# Altium PCB BaseStation.PcbDoc (part 1 of 2)
Units mil, origin at the board's own origin, x right, y up, seen from the top; angles counter-clockwise.
Board outline 2500 x 2500 mil, 4 copper layers (Component Side, Ground Plane, Power Plane, Solder Side), stack 60.8 mil thick; 157 components, 102 nets, 605 pads, 408 vias.
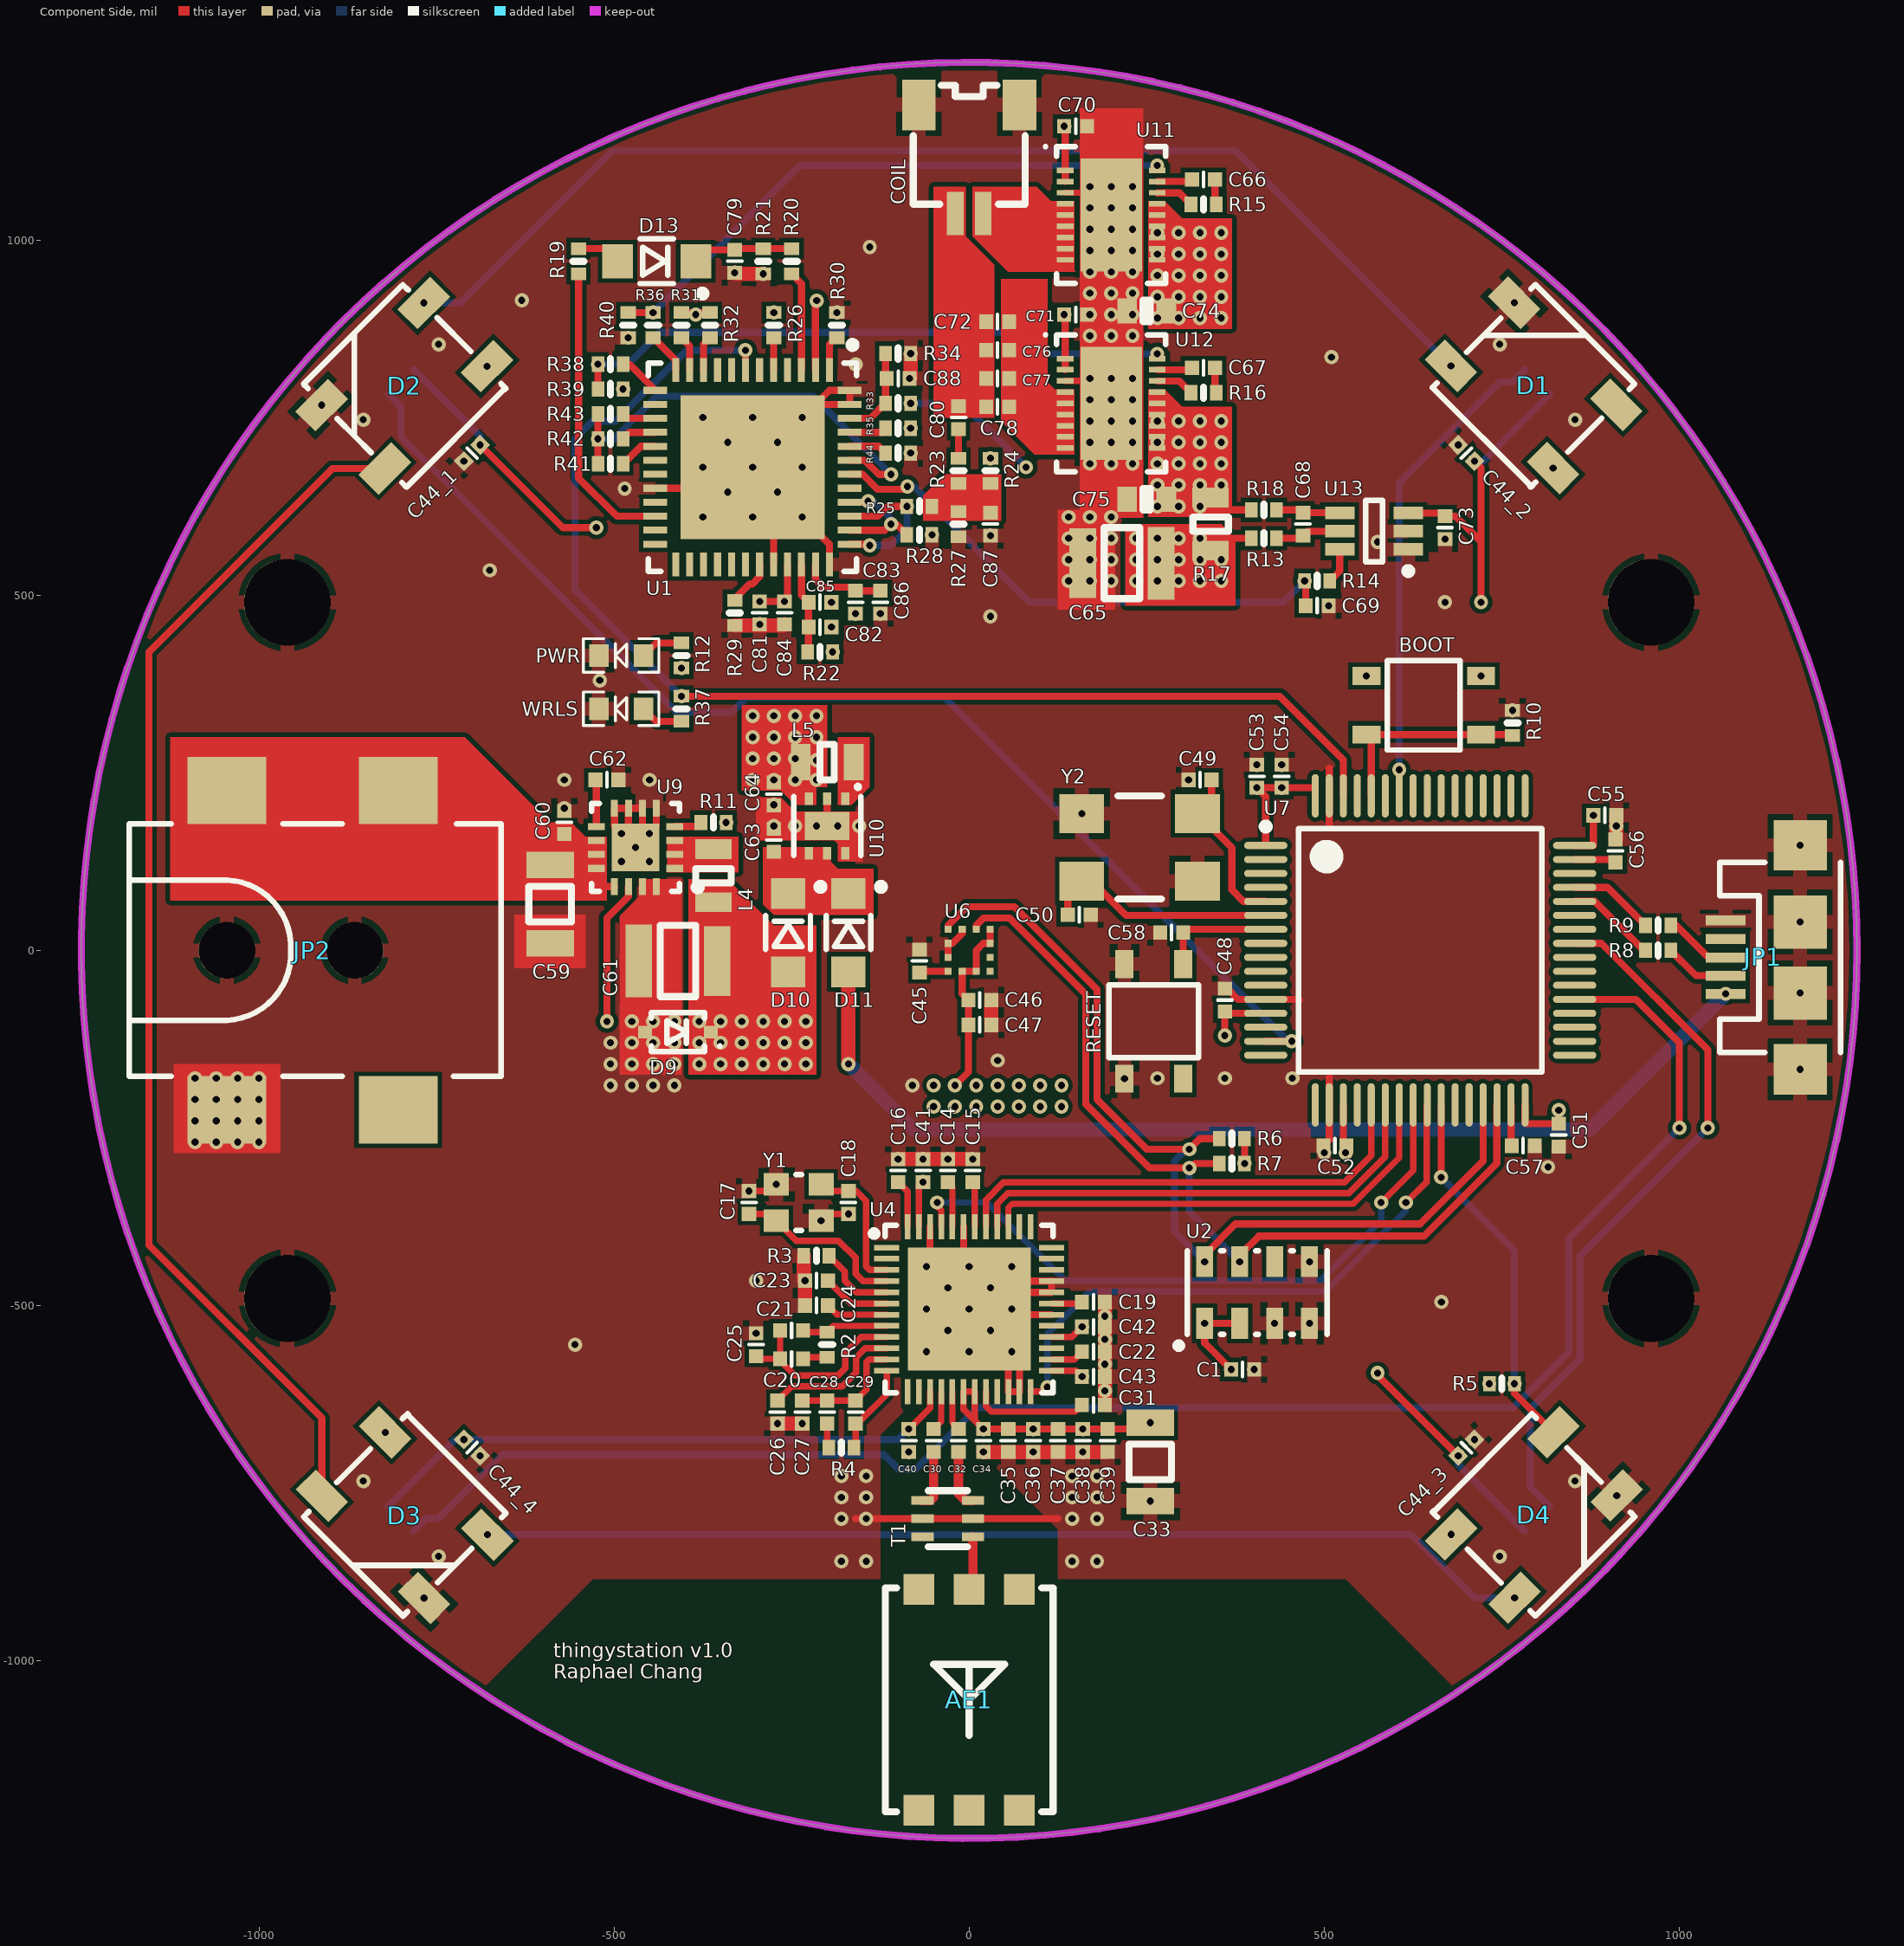
[diagram p0: Component Side view]
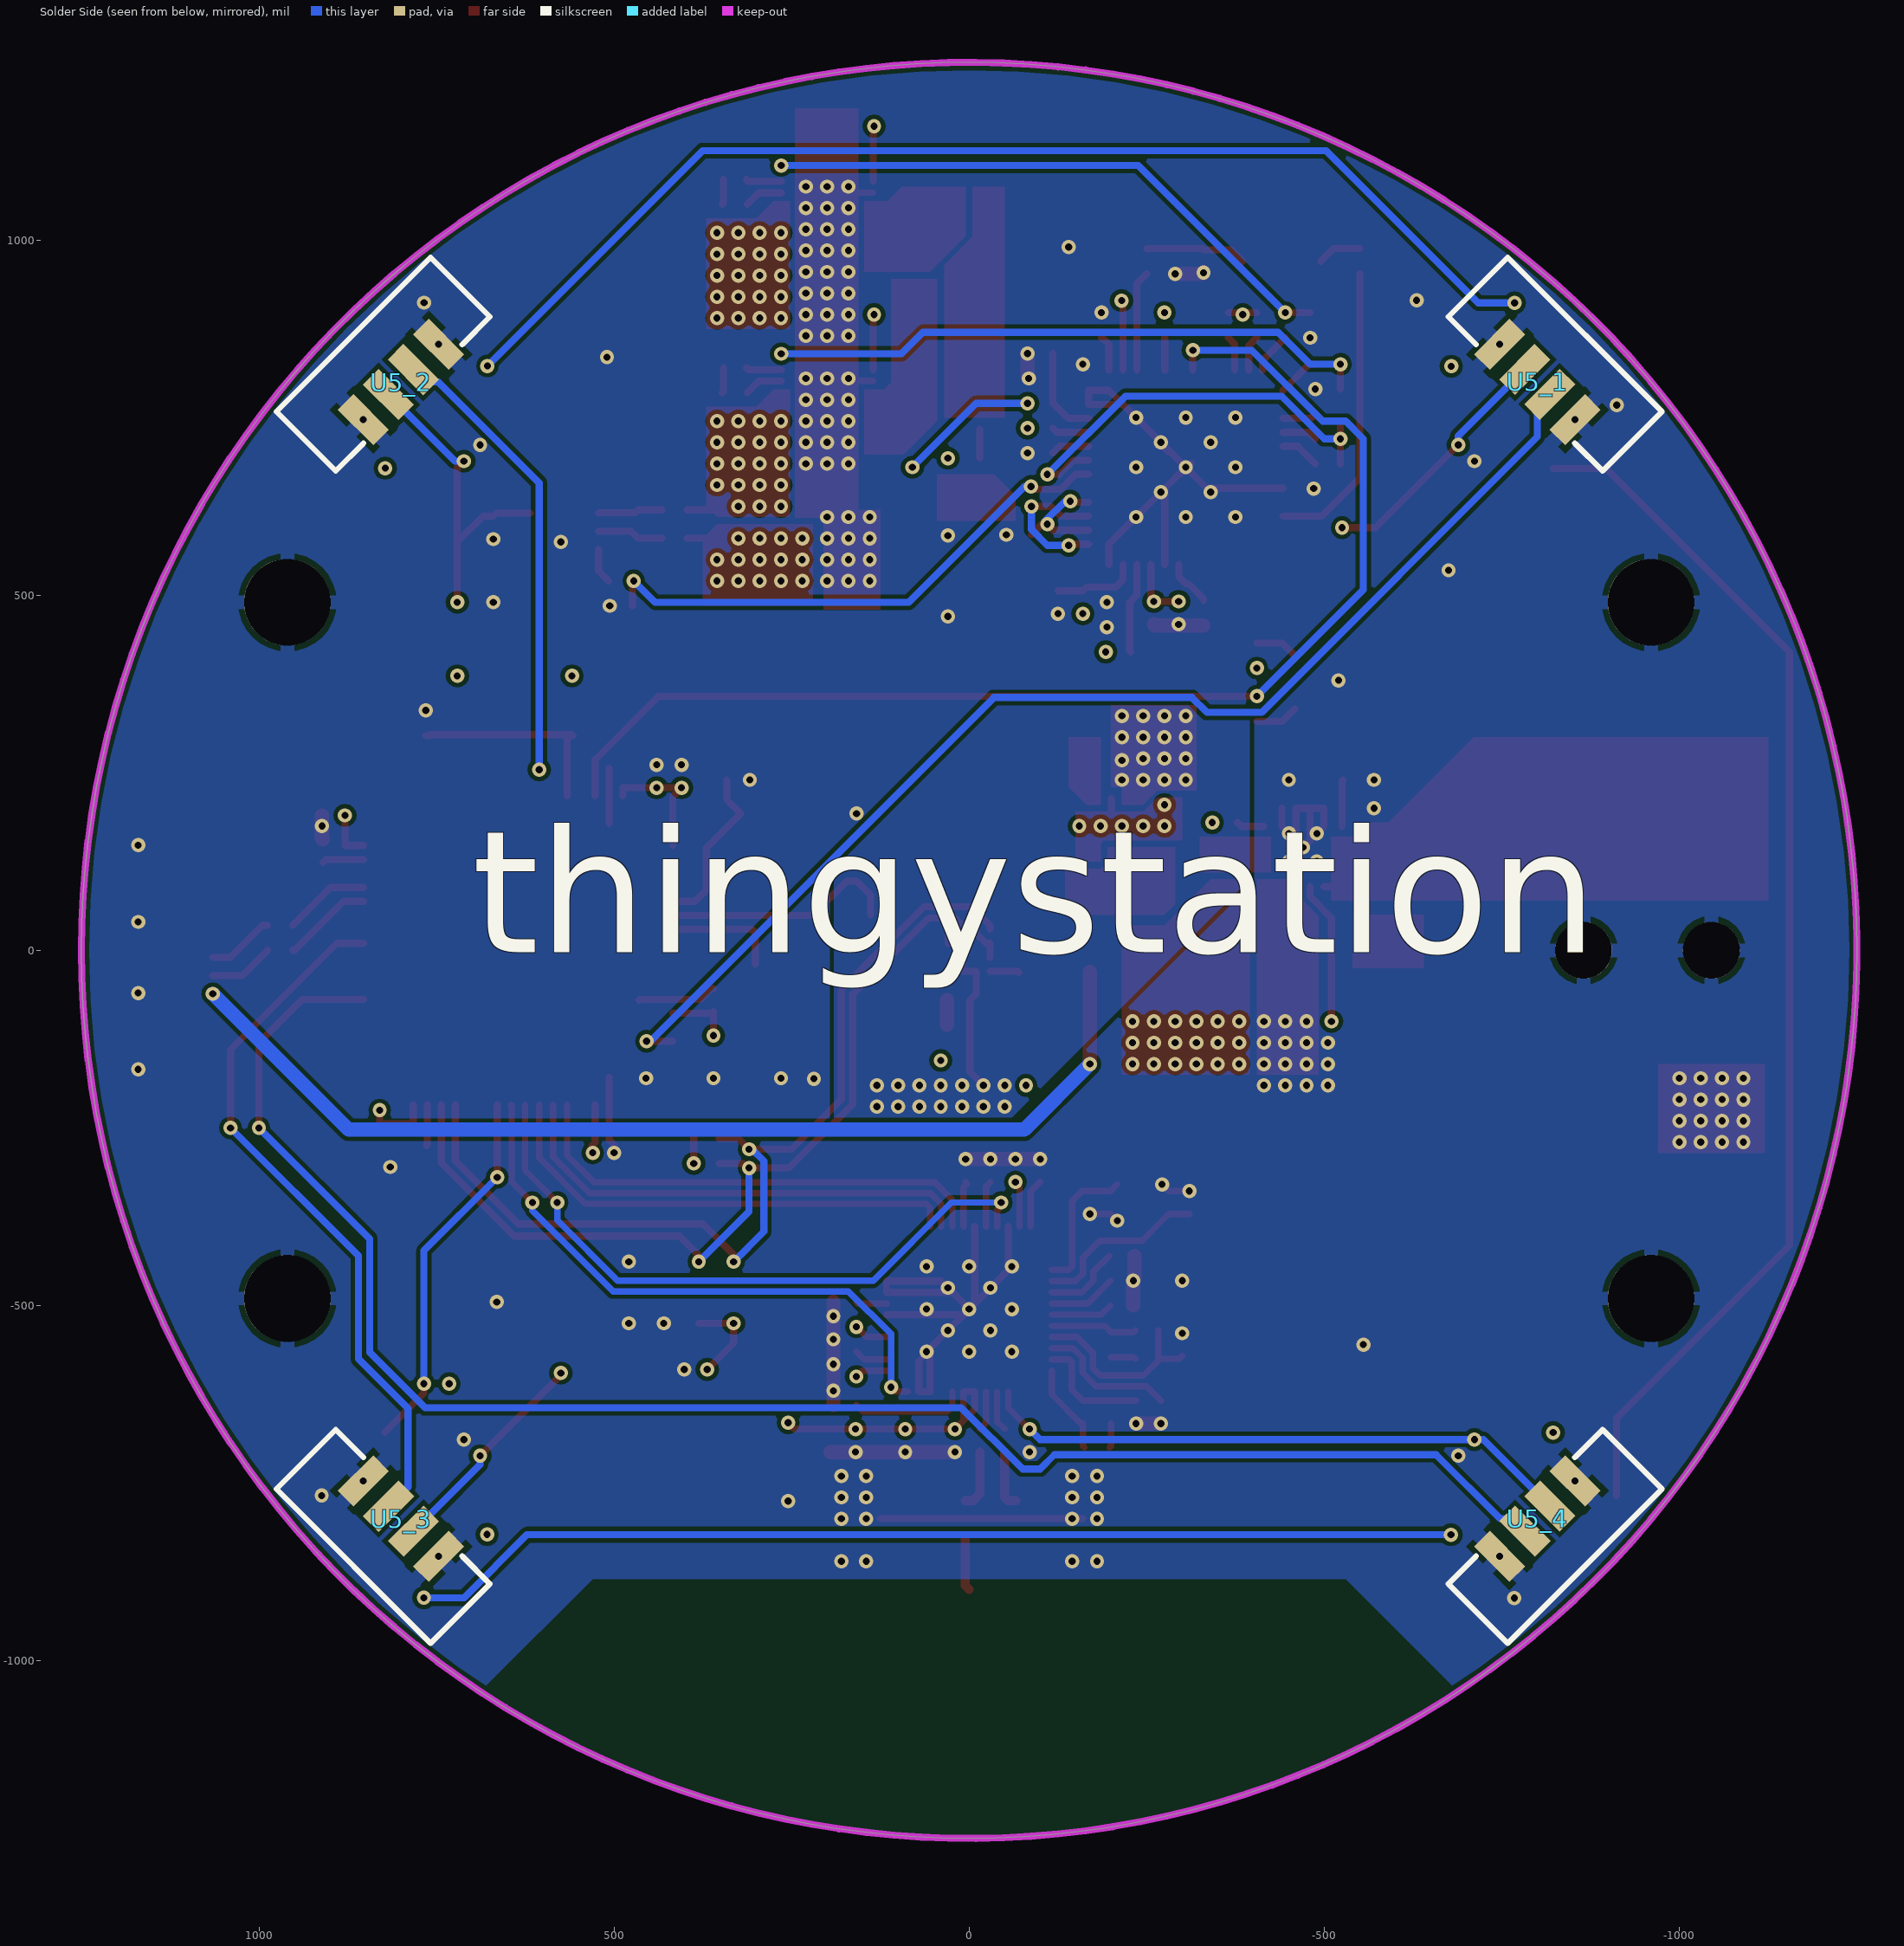
[diagram p1: Solder Side view, seen from below]
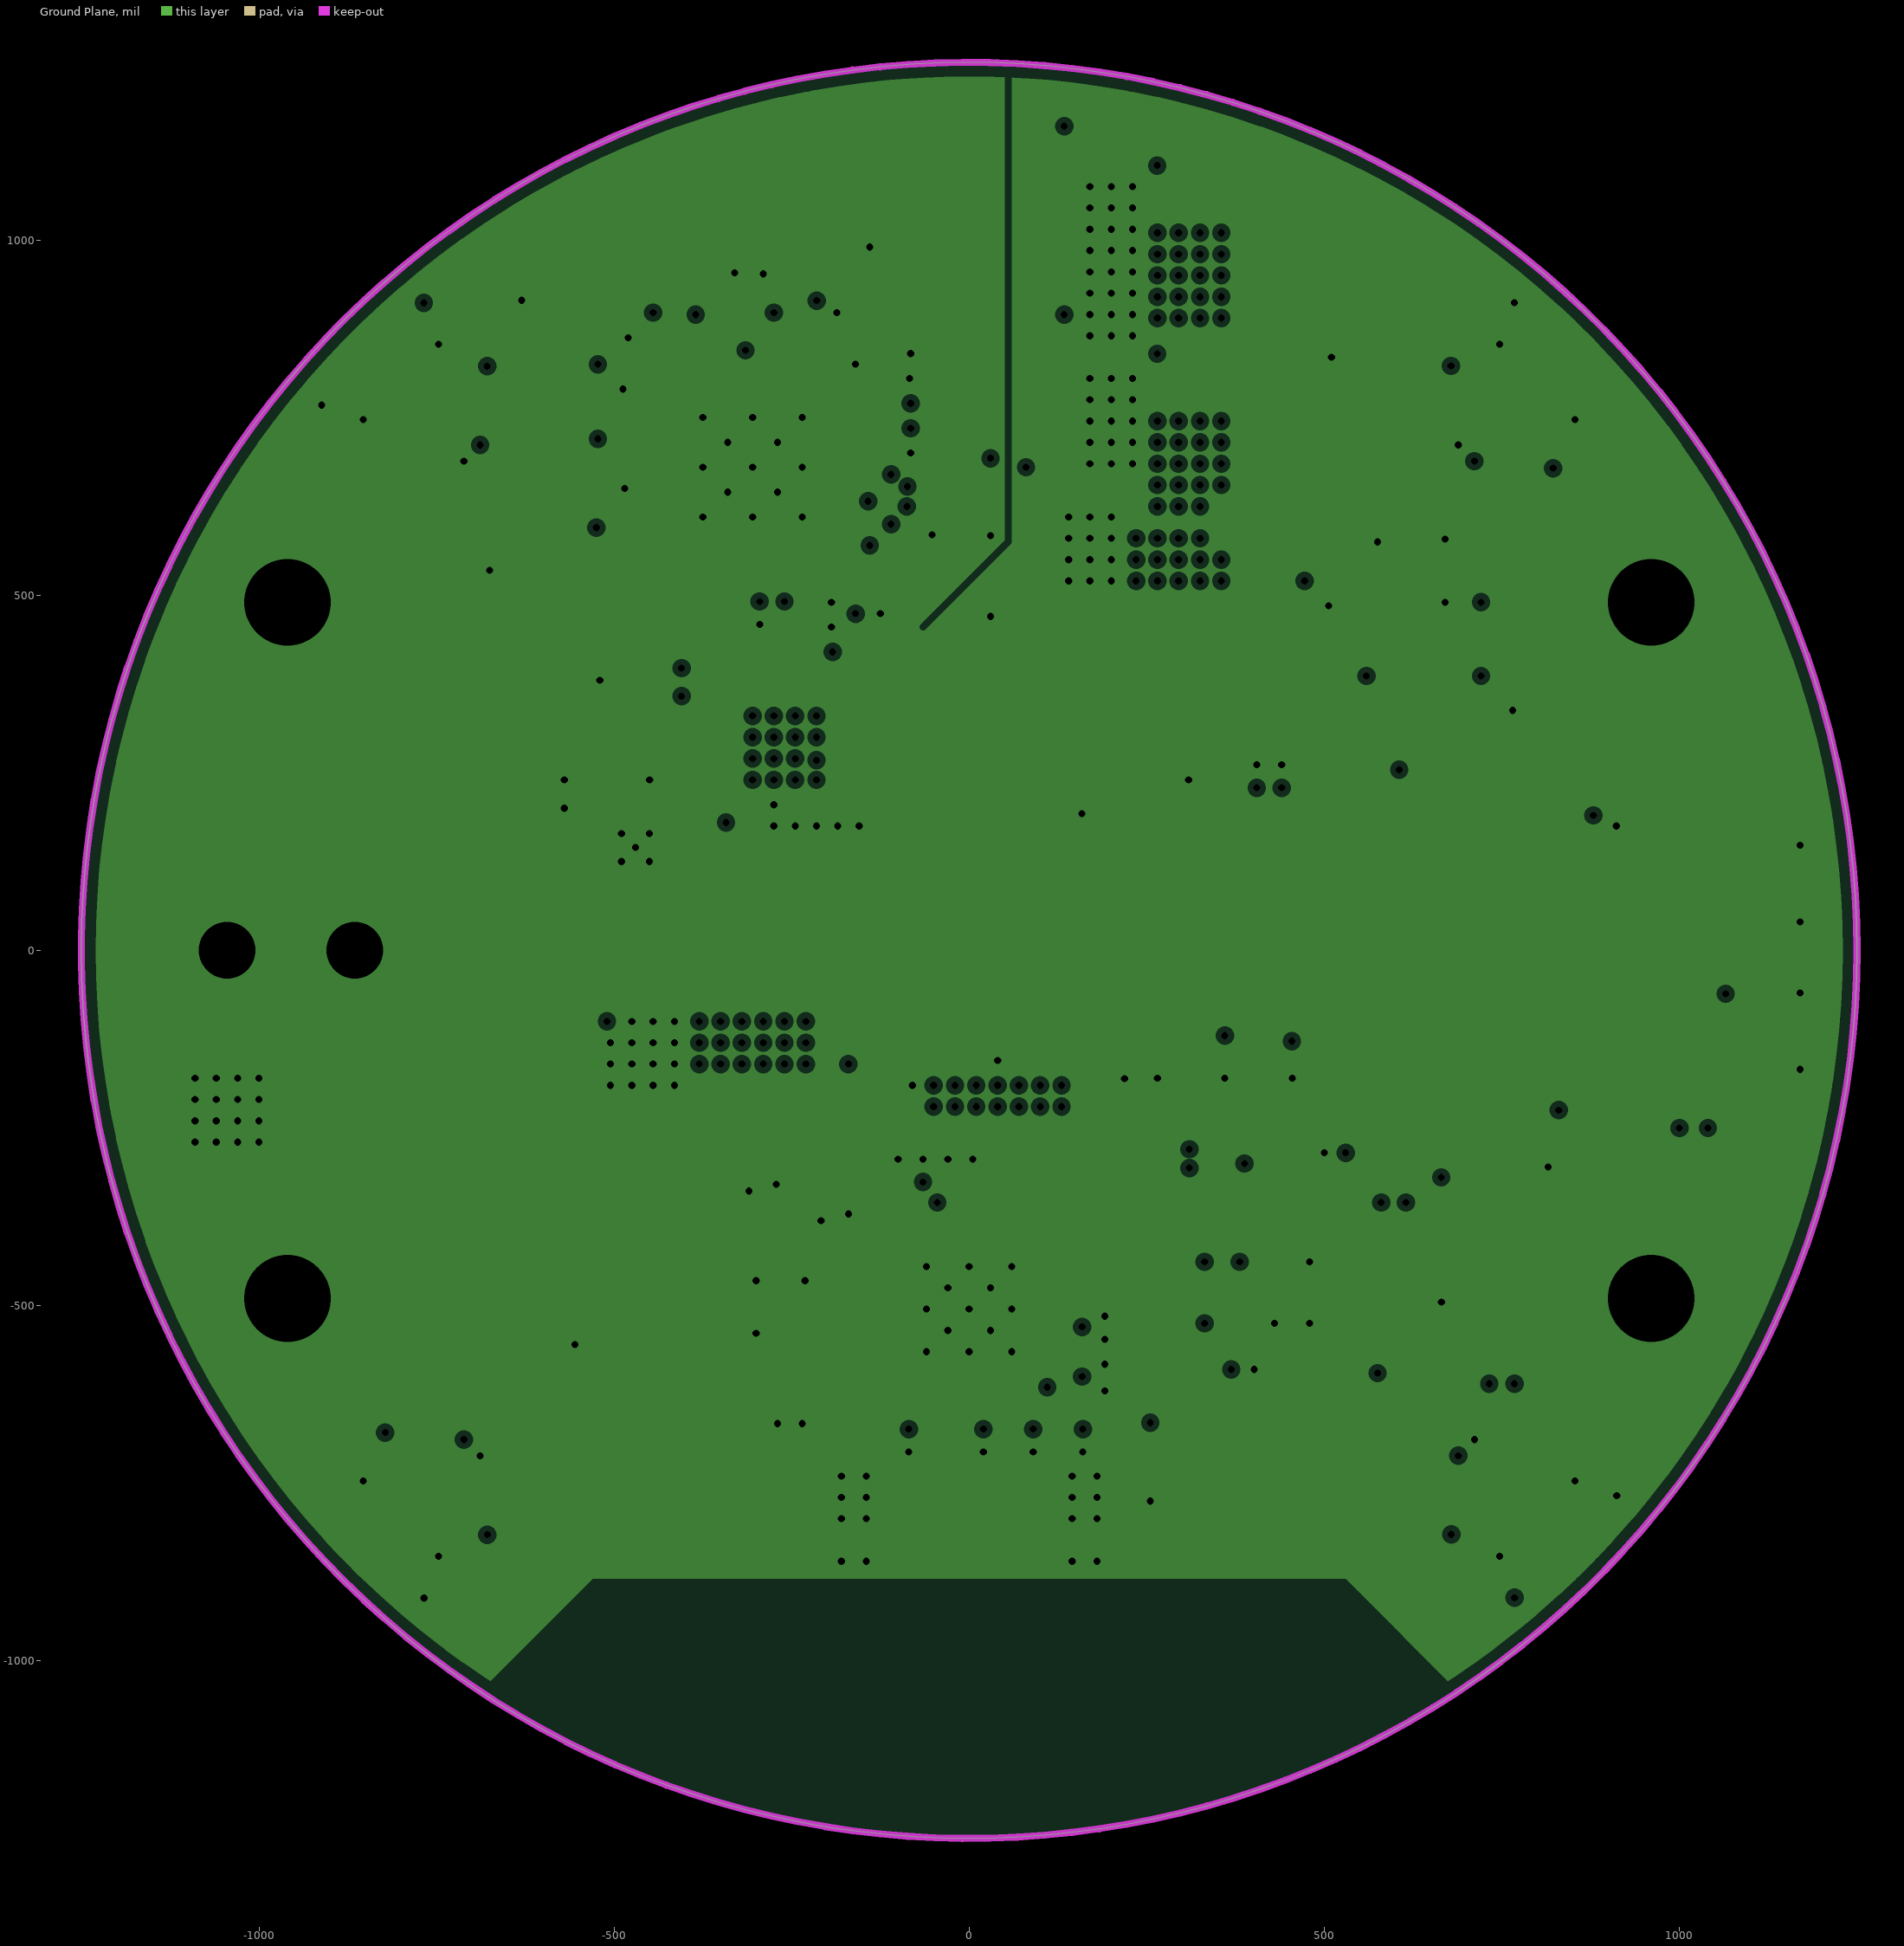
[diagram p2: Ground Plane, clearances drawn from the general rule]
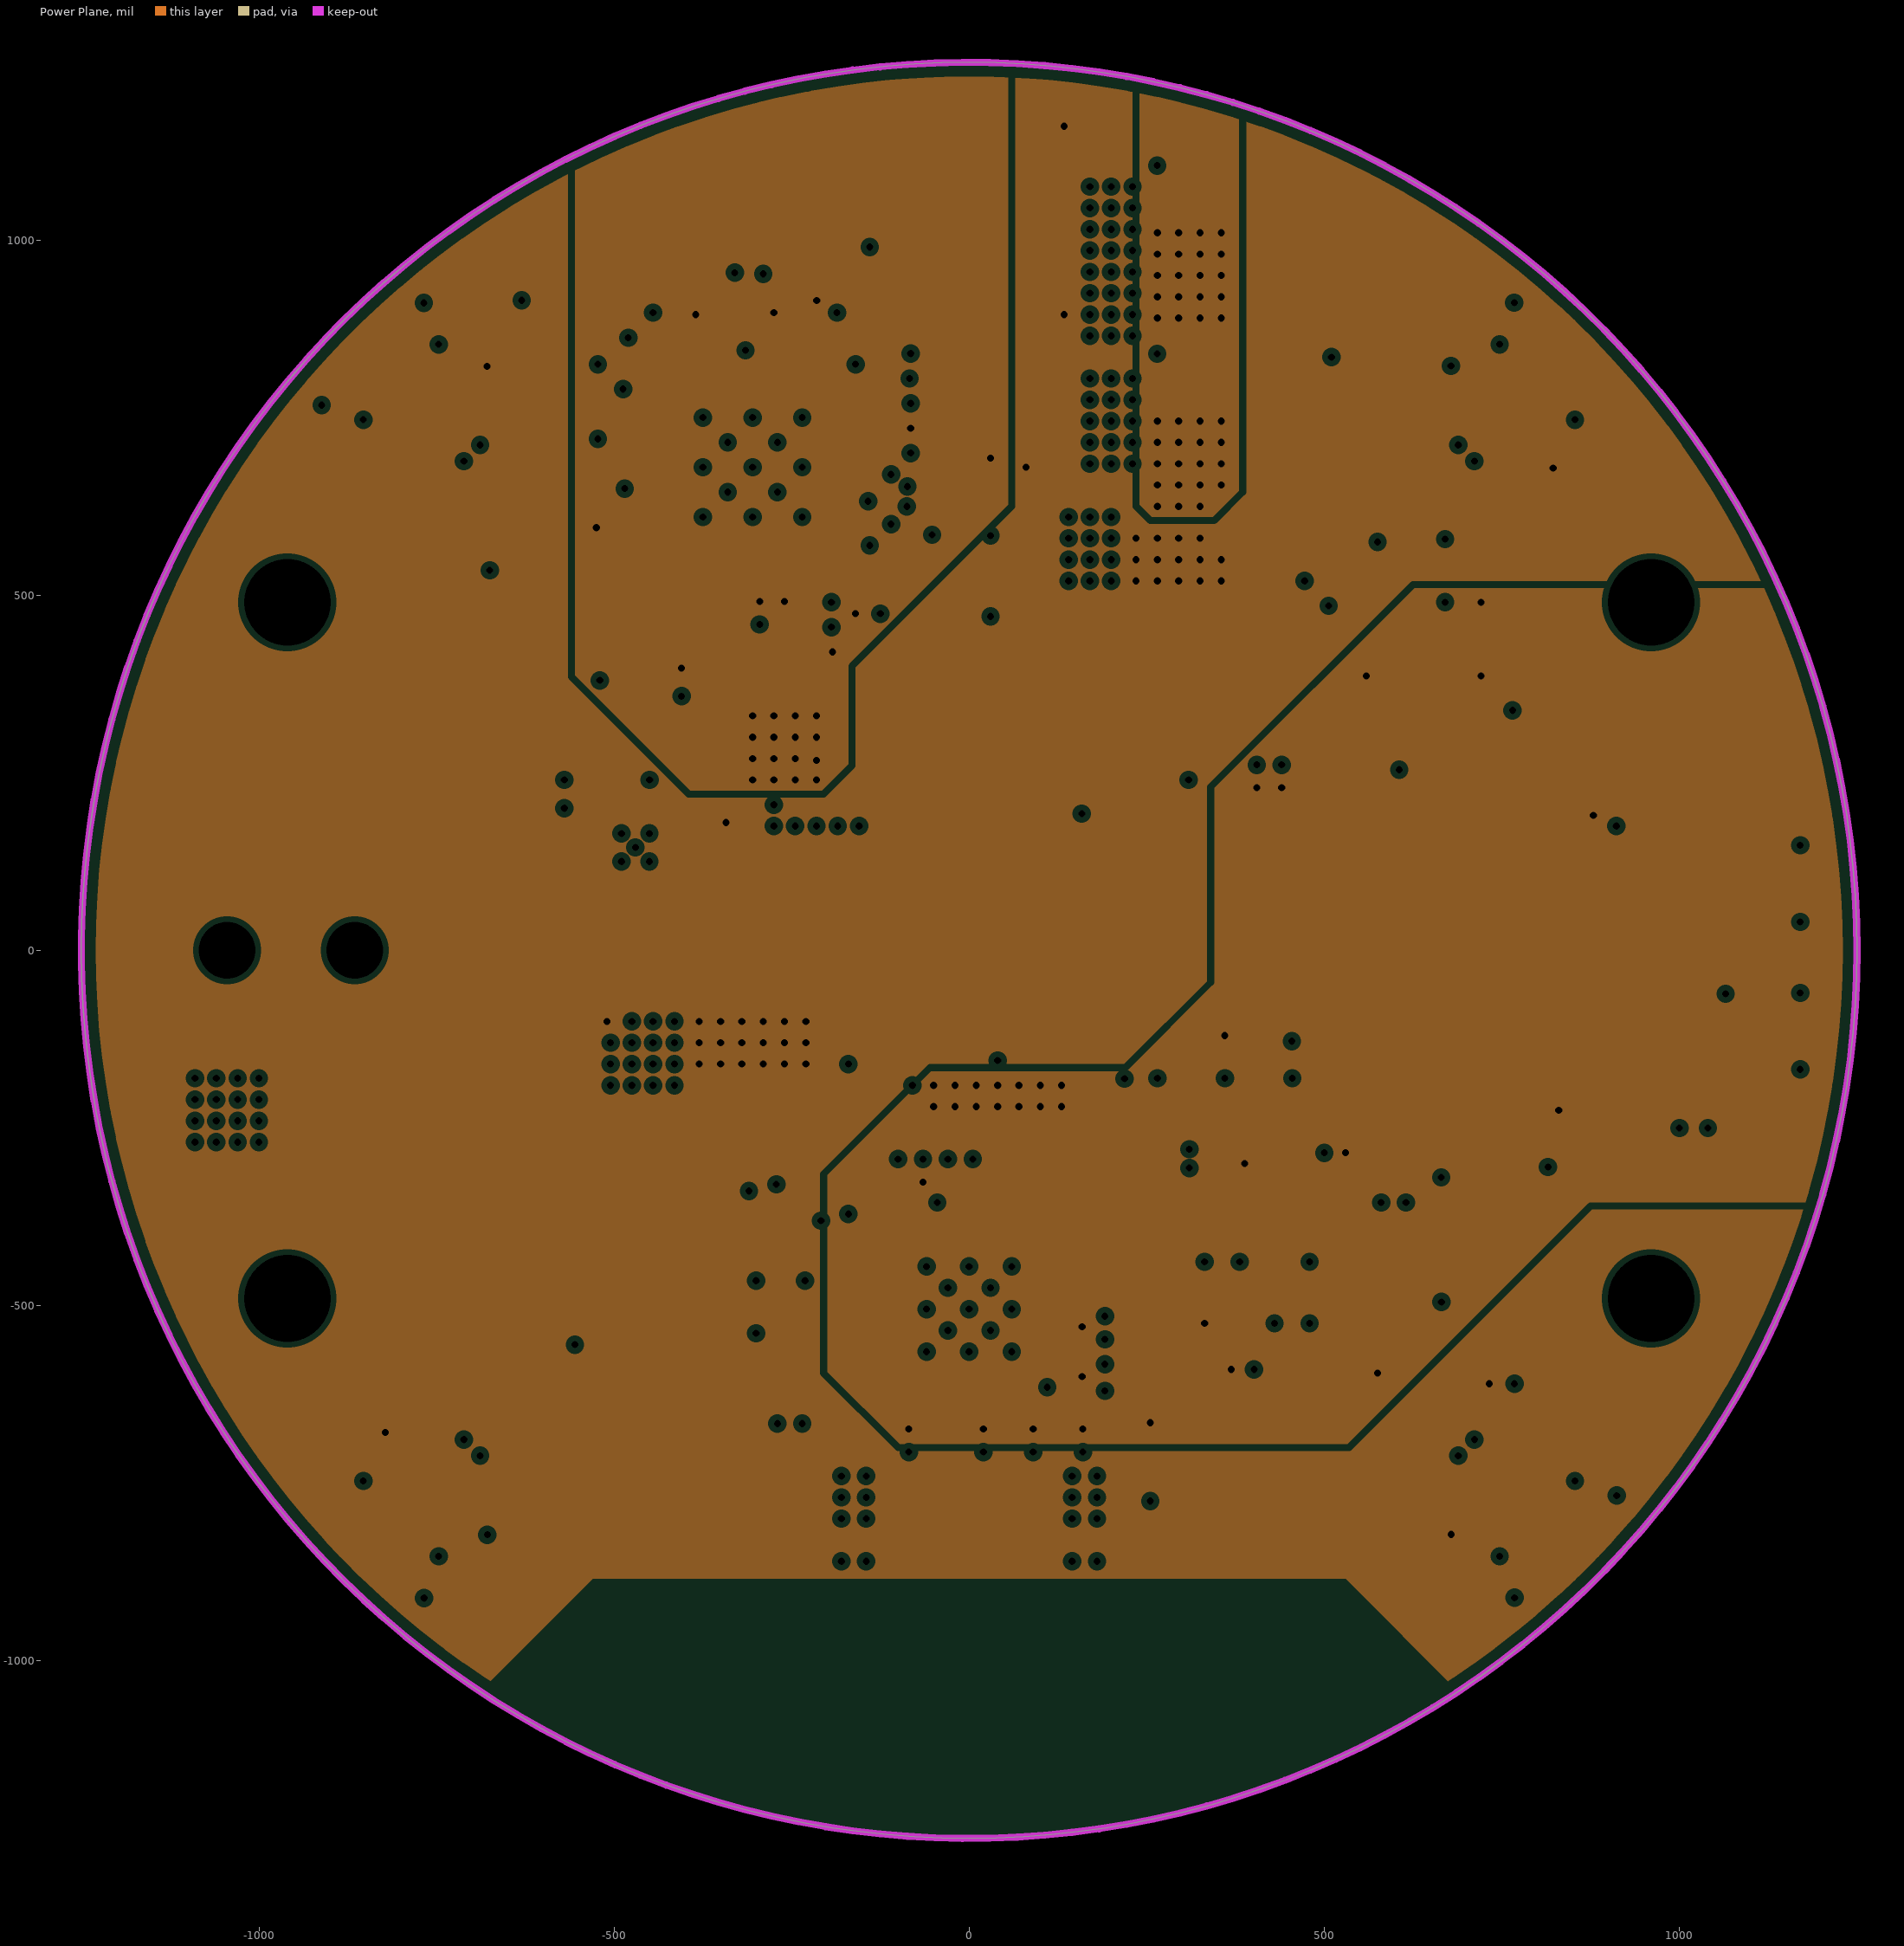
[diagram p3: Power Plane, clearances drawn from the general rule]
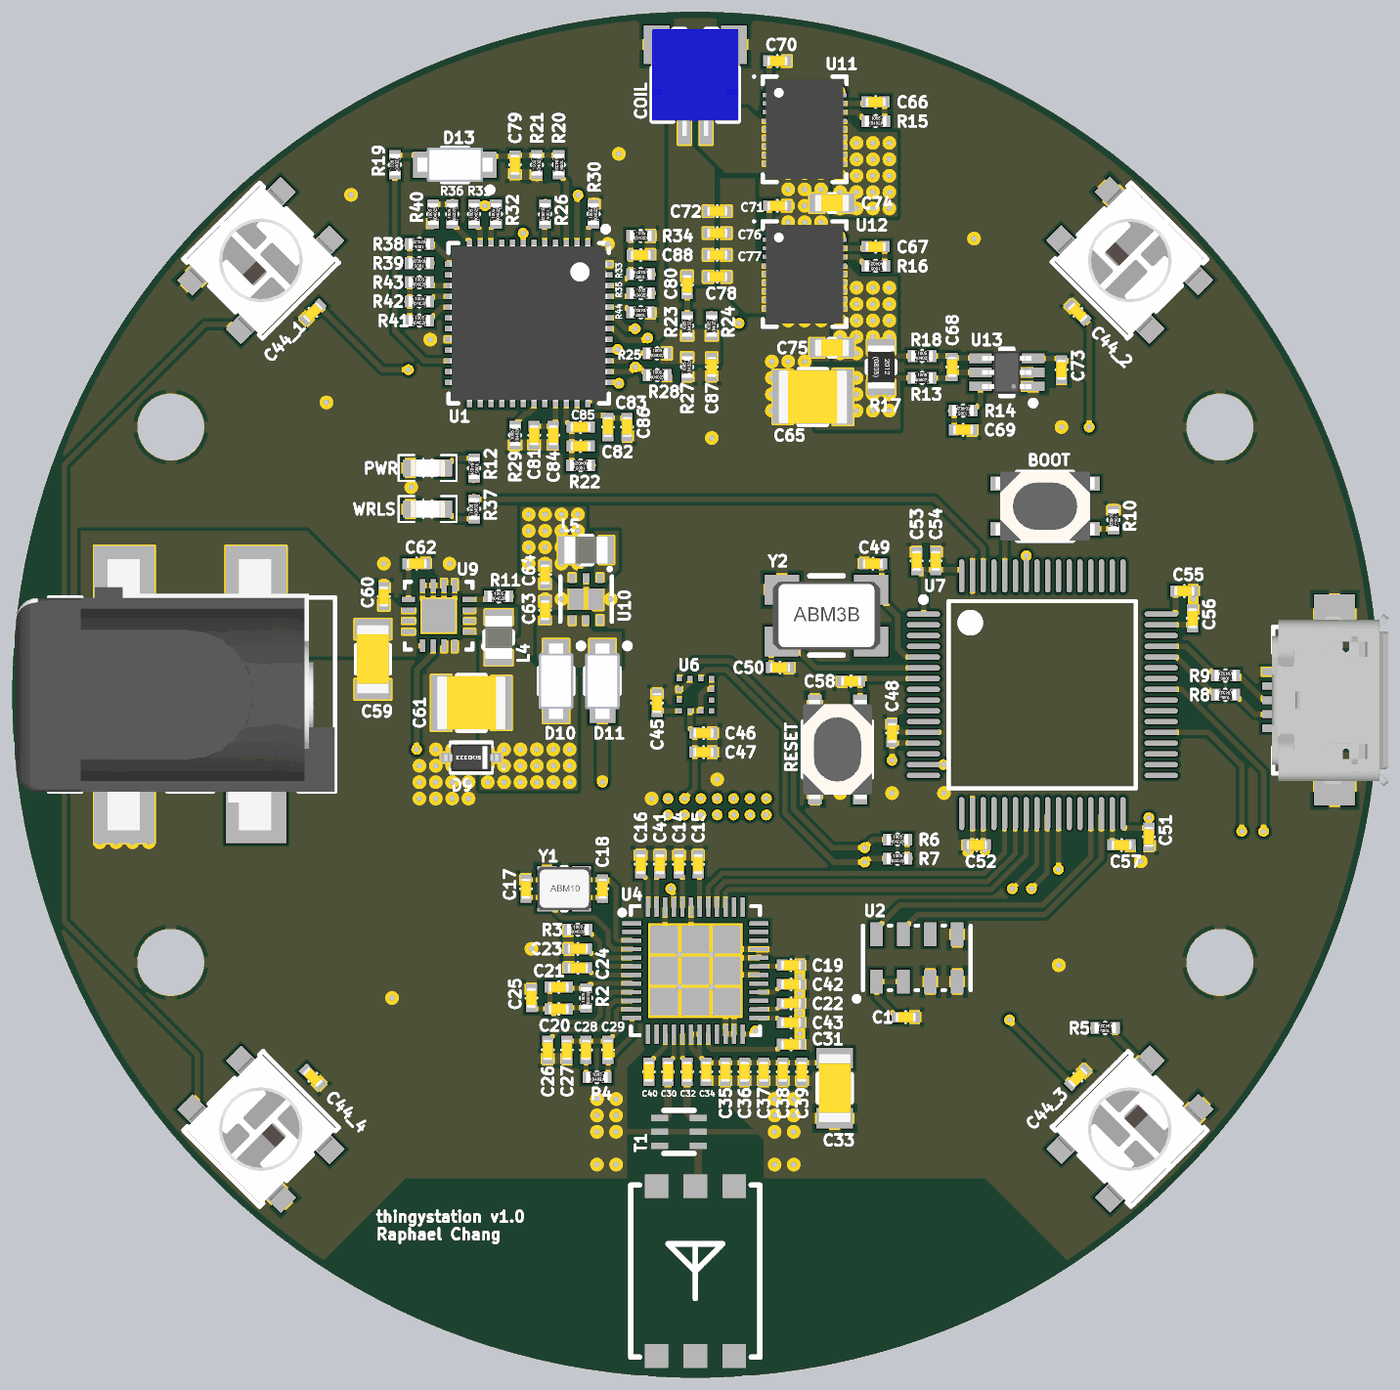
[diagram p5: 3D render of the assembled board from above, using the file's embedded part models]

## Layer stack, top to bottom
Top Solder: solder mask 0.4, Solder Resist, Dk 3.5
Component Side: signal copper 1.4
Dielectric 1: prepreg 9.1, 2116, Dk 4.2
Ground Plane: plane copper 1.4, net GND
Dielectric 3: core 37, FR-4, Dk 4.2
Power Plane: plane copper 1.4, net (Multiple Nets)
Dielectric 4: prepreg 9.1, 2116, Dk 4.2
Solder Side: signal copper 1.4
Bottom Solder: solder mask 0.4, Solder Resist, Dk 3.5

## Board outline
-1250,0 ccw(c0,0) 0,-1250 ccw(c0,0) 1250,0 ccw(c0,0) 0,1250 ccw(c0,0)

## Design rules (kind name [scope] priority, off if disabled: settings)
Clearance [All] p1: gap=6
HoleSize [All] p1: absolutevalues=TRUE maxlimit=300 minlimit=1 maxpercent=80.000 minpercent=20.000
PlaneClearance [All] p1: clearance=8
PlaneConnect [All] p1: planeconnectstyle=Direct reliefexpansion=20 reliefentries=4 reliefconductorwidth=10 reliefairgap=10
PolygonConnect PolygonConnect_Via [IsVia] p1: connectstyle=Direct reliefconductorwidth=10 reliefentries=4 polygonreliefangle="90 Angle" airgapwidth=10
PolygonConnect [All] p2: connectstyle=Relief reliefconductorwidth=20 reliefentries=4 polygonreliefangle="90 Angle" airgapwidth=8
RoutingVias [All] p1: holewidth=10 width=20 viastyle="Through Hole" minholewidth=10 minwidth=20 maxholewidth=10 maxwidth=20
SolderMaskExpansion SolderMaskExpansion_Via [IsVia] p1: expansion=1 soldermaskfromhole=TRUE
SolderMaskExpansion [All] p2: expansion=2.5
Width [All] p1: maxlimit=50 minlimit=8 preferedwidth=10
27 further rules are at their usual default settings.

## Classes and differential pairs
component class 1: C44_1 U5_1
component class 2: C44_2 U5_2
component class 3: C44_3 U5_3
component class 4: C44_4 U5_4
component class U_Barometer: C1 U2
component class U_DW1000: AE1 AE2 C14 C15 C16 C17 C18 C19 C20 C21 C22 C23 C24 C25 C26 C27 C28 C29 C30 C31 C32 C33 C34 C35 C36 C37 C38 C39 C40 C41 C42 C43 R2 R3 R4 T1 U4 Y1
component class U_LEDs: D1 D2 D3 D4 R5
component class U_Magnetometer: C45 C46 C47 U6
component class U_MCU: BOOT C48 C49 C50 C51 C52 C53 C54 C55 C56 C57 C58 R6 R7 R8 R9 R10 RESET U7 Y2
component class U_Power: C59 C60 C61 C62 C63 C64 D9 D10 D11 D12 JP1 JP2 L4 L5 R11 R12 U9 U10
component class U_WirelessPower: C65 C66 C67 C68 C69 C70 C71 C72 C73 C74 C75 C76 C77 C78 C79 C80 C81 C82 C83 C84 C85 C86 C87 C88 COIL D13 R13 R14 R15 R16 R17 R18 R19 R20 R21 R22 R23 R24 R25 R26 R27 R28 R29 R30 R31 R32 R33 R34 R35 R36 R37 R38 R39 R40 R41 R42 R43 R44 U1 U11 U12 U13 WRLS
channel class IR: 1 2 3 4

## Components (designator, comment, footprint, x,y, rotation, side; value= is the part's Value field where it differs from the comment)
AE1 "AH086M555003-T" AH086M555003-T 0,-1055 r180 top
BOOT "" SWITCH 640,345 r180 top
C1 "0.1uF 6.3V 0402" C0402[1005X55] 385,-590 r180 top
C14 "0.1uF 6.3V 0402" C0402[1005X55] -30,-310 r270 top
C15 "0.1uF 6.3V 0402" C0402[1005X55] 5,-310 r90 top
C16 "0.1uF 6.3V 0402" C0402[1005X55] -100,-310 r90 top
C17 "10pF 50V 0402" C0402[1005X55] -310,-355 r270 top
C18 "10pF 50V 0402" C0402[1005X55] -170,-355 r90 top
C19 "0.1uF 6.3V 0402" C0402[1005X55] 175,-495 r0 top
C20 "27pF 50V 0402" C0402[1005X55] -250,-575 r0 top
C21 "1.2pF 50V 0402" C0402[1005X55] -250,-535 r0 top
C22 "0.1uF 6.3V 0402" C0402[1005X55] 175,-565 r180 top
C23 "0.1uF 6.3V 0402" C0402[1005X55] -215,-465 r0 top
C24 "0.1uF 6.3V 0402" C0402[1005X55] -215,-500 r0 top
C25 "0.1uF 6.3V 0402" C0402[1005X55] -300,-555 r270 top
C26 "0.1uF 6.3V 0402" C0402[1005X55] -270,-650 r90 top
C27 "0.1uF 6.3V 0402" C0402[1005X55] -235,-650 r90 top
C28 "820pF 50V 0402" C0402[1005X55] -200,-650 r90 top
C29 "18pF 50V 0402" C0402[1005X55] -160,-650 r90 top
C30 "12pF 50V 0402" C0402[1005X55] -50,-690 r90 top
C31 "0.1uF 6.3V 0402" C0402[1005X55] 175,-640 r180 top
C32 "12pF 50V 0402" C0402[1005X55] -15,-690 r90 top
C33 "47uF 6.3V 1206" C1206[3216X160] 255,-720 r90 top
C34 "0.1uF 6.3V 0402" C0402[1005X55] 20,-690 r90 top
C35 "10pF 50V 0402" C0402[1005X55] 55,-690 r90 top
C36 "330pF 50V 0402" C0402[1005X55] 90,-690 r90 top
C37 "0.1uF 6.3V 0402" C0402[1005X55] 125,-690 r90 top
C38 "10pF 50V 0402" C0402[1005X55] 160,-690 r90 top
C39 "330pF 50V 0402" C0402[1005X55] 195,-690 r90 top
C40 "10nF 50V 0402" C0402[1005X55] -85,-690 r90 top
C41 "0.1uF 6.3V 0402" C0402[1005X55] -65,-310 r270 top
C42 "0.1uF 6.3V 0402" C0402[1005X55] 175,-530 r180 top
C43 "0.1uF 6.3V 0402" C0402[1005X55] 175,-600 r180 top
C44_1 "0.1uF 6.3V 0402" C0402[1005X55] -700,700 r45 top (schematic designator C44)
C44_2 "0.1uF 6.3V 0402" C0402[1005X55] 700,700 r315 top (schematic designator C44)
C44_3 "0.1uF 6.3V 0402" C0402[1005X55] 700,-700 r225 top (schematic designator C44)
C44_4 "0.1uF 6.3V 0402" C0402[1005X55] -700,-700 r135 top (schematic designator C44)
C45 "0.1uF 6.3V 0402" C0402[1005X55] -70,-15 r270 top
C46 "0.1uF 6.3V 0402" C0402[1005X55] 15,-70 r180 top
C47 "1uF 6.3V 0402" C0402[1005X55] 15,-105 r180 top
C48 "4.7uF 6.3V 0402" C0402[1005X55] 360,-70 r270 top
C49 "15pF 50V 0402" C0402[1005X55] 325,240 r180 top
C50 "15pF 50V 0402" C0402[1005X55] 155,50 r0 top
C51 "2.2uF 6.3V 0402" C0402[1005X55] 830,-260 r90 top
C52 "2.2uF 6.3V 0402" C0402[1005X55] 515,-275 r0 top
C53 "2.2uF 6.3V 0402" C0402[1005X55] 405,245 r270 top
C54 "2.2uF 6.3V 0402" C0402[1005X55] 440,245 r270 top
C55 "2.2uF 6.3V 0402" C0402[1005X55] 895,190 r180 top
C56 "2.2uF 6.3V 0402" C0402[1005X55] 910,140 r270 top
C57 "2.2uF 6.3V 0402" C0402[1005X55] 780,-275 r180 top
C58 "0.1uF 6.3V 0402" C0402[1005X55] 285,25 r0 top
C59 "10uF 50V 1206" C1206[3216X160] -590,65 r90 top
C60 "0.1uF 100V 0402" C0402[1005X55] -570,180 r270 top
C61 "47uF 6.3V 1210" C1210[3225X250] -410,-15 r0 top
C62 "3.3nF 50V 0402" C0402[1005X55] -510,240 r180 top
C63 "10uF 6.3V 0402" C0402[1005X55] -275,155 r270 top
C64 "10uF 6.3V 0402" C0402[1005X55] -275,220 r90 top
C65 "47uF 6.3V 1210" C1210[3225X250] 215,545 r180 top
C66 "0.1uF 100V 0402" C0402[1005X55] 330,1085 r180 top
C67 "0.1uF 100V 0402" C0402[1005X55] 330,820 r0 top
C68 "1uF 6.3V 0402" C0402[1005X55] 470,600 r270 top
C69 "0.1uF 6.3V 0402" C0402[1005X55] 490,485 r180 top
C70 "1uF 6.3V 0402" C0402[1005X55] 150,1160 r180 top
C71 "1uF 6.3V 0402" C0402[1005X55] 150,895 r180 top
C72 "0.1uF 100V 0402" C0402[1005X55] 40,885 r0 top
C73 "10nF 50V 0402" C0402[1005X55] 670,595 r90 top
C74 "10uF 16V 0603" C0603[1608X92] 250,900 r0 top
C75 "10uF 16V 0603" C0603[1608X92] 250,635 r0 top
C76 "0.1uF 100V 0402" C0402[1005X55] 40,845 r0 top
C77 "0.1uF 100V 0402" C0402[1005X55] 40,805 r0 top
C78 "0.1uF 100V 0402" C0402[1005X55] 40,765 r0 top
C79 "4.7uF 6.3V 0402" C0402[1005X55] -330,970 r90 top
C80 "4.7nF 50V 0402" C0402[1005X55] -15,750 r90 top
C81 "1uF 6.3V 0402" C0402[1005X55] -295,475 r90 top
C82 "1uF 6.3V 0402" C0402[1005X55] -210,455 r0 top
C83 "1uF 6.3V 0402" C0402[1005X55] -160,490 r270 top
C84 "4.7uF 6.3V 0402" C0402[1005X55] -260,475 r90 top
C85 "4.7uF 6.3V 0402" C0402[1005X55] -210,490 r0 top
C86 "1uF 6.3V 0402" C0402[1005X55] -125,490 r270 top
C87 "33pF 50V 0402" C0402[1005X55] 30,600 r90 top
C88 "4.7nF 50V 0402" C0402[1005X55] -100,805 r180 top
COIL "COIL" JST-SH-2-SMD-HORZ 0,1190 r180 top (schematic designator JP3)
D1 "WS2812B" WS2812B 795,795 r135 top
D2 "WS2812B" WS2812B -795,795 r225 top
D3 "WS2812B" WS2812B -795,-795 r315 top
D4 "WS2812B" WS2812B 795,-795 r45 top
D9 "SP4021-01FTG" SOD-323 -410,-115 r180 top
D10 "PMEG6020ER" SOD-123 -255,25 r270 top
D11 "PMEG6020ER" SOD-123 -170,25 r270 top
D13 "PMEG6020ER" SOD-123 -440,970 r180 top
JP1 "USB" USB-MICROB 1170,-10 r90 top
JP2 "" POWER_JACK_SMD -1045,0 r0 top
L4 "2.2uH" IND0805 -360,105 r270 top
L5 "2.2uH" IND0805 -200,265 r180 top
PWR "LED_0603_GREEN_5mA" LED0603 -490,415 r180 top (schematic designator D12)
R2 "16K 1% 0402" R0402[1005] -200,-555 r90 top
R3 "11K 1% 0402" R0402[1005] -215,-430 r0 top
R4 "270R 1% 0402" R0402[1005] -180,-700 r0 top
R5 "2K2 1% 0402" R0402[1005] 750,-610 r180 top
R6 "2K2 1% 0402" R0402[1005] 370,-265 r0 top
R7 "2K2 1% 0402" R0402[1005] 370,-300 r0 top
R8 "22R 1% 0402" R0402[1005] 970,0 r180 top
R9 "22R 1% 0402" R0402[1005] 970,35 r180 top
R10 "10K 1% 0402" R0402[1005] 765,320 r270 top
R11 "100K 1% 0402" R0402[1005] -360,180 r0 top
R12 "150R 1% 0402" R0402[1005] -405,415 r270 top
R13 "10R 1% 0402" R0402[1005] 415,580 r0 top
R14 "1K 1% 0402" R0402[1005] 490,520 r180 top
R15 "1R 1% 0402" R0402[1005] 330,1050 r0 top
R16 "1R 1% 0402" R0402[1005] 330,785 r180 top
R17 "0.02R 1% 0805" R0805[2012] 340,600 r270 top
R18 "10R 1% 0402" R0402[1005] 415,620 r0 top
R19 "475R 1% 0402" R0402[1005] -550,970 r90 top
R20 "523K 1% 0402" R0402[1005] -250,970 r270 top
R21 "523K 1% 0402" R0402[1005] -290,970 r90 top
R22 "22R 1% 0402" R0402[1005] -210,420 r180 top
R23 "100K 1% 0402" R0402[1005] -15,675 r90 top
R24 "12.1K 1% 0402" R0402[1005] 30,675 r90 top
R25 "10R 1% 0402" R0402[1005] -70,625 r0 top
R26 "10K 1% 0402" R0402[1005] -275,880 r270 top
R27 "10K 1% 0402" R0402[1005] -15,600 r90 top
R28 "10R 1% 0402" R0402[1005] -70,585 r0 top
R29 "10K 1% 0402" R0402[1005] -330,475 r90 top
R30 "10K 1% 0402" R0402[1005] -186.17,880 r90 top
R31 "10K 1% 0402" R0402[1005] -405,880 r90 top
R32 "10K 1% 0402" R0402[1005] -365,880 r90 top
R33 "76K8 1% 0402" R0402[1005] -100,770 r180 top
R34 "10K 1% 0402" R0402[1005] -100,840 r0 top
R35 "10K 1% 0402" R0402[1005] -100,735 r0 top
R36 "10R 1% 0402" R0402[1005] -445,880 r90 top
R37 "475R 1% 0402" R0402[1005] -405,340 r90 top
R38 "10R 1% 0402" R0402[1005] -505,825 r180 top
R39 "3K6 1% 0402" R0402[1005] -505,790 r180 top
R40 "3K6 1% 0402" R0402[1005] -480,880 r90 top
R41 "48K7 1% 0402" R0402[1005] -505,685 r0 top
R42 "56K2 1% 0402" R0402[1005] -505,720 r0 top
R43 "53K6 1% 0402" R0402[1005] -505,755 r0 top
R44 "56K2 1% 0402" R0402[1005] -100,700 r180 top
RESET "" SWITCH 260,-100 r270 top
T1 "HHM1595A1" HHM1595A1 -30,-800 r90 top
U1 "BQ500212ARGZR" "QFN-48 (0.5MM)" -305,680 r270 top
U2 "MS5611" MS5611 405.39,-481.69 r90 top
U4 "DW1000" QFN-48 0,-505 r0 top
U5_1 "TSSP77P38" TSSP77P38 -800,800 r225 bottom (schematic designator U5)
U5_2 "TSSP77P38" TSSP77P38 800,800 r135 bottom (schematic designator U5)
U5_3 "TSSP77P38" TSSP77P38 800,-800 r45 bottom (schematic designator U5)
U5_4 "TSSP77P38" TSSP77P38 -800,-800 r315 bottom (schematic designator U5)
U6 "LIS3MDLTR" "LGA-12 (2x2MM)" 0,0 r0 top
U7 "STM32F405RGT6" STM-LQFP64_L 635,0 r0 top
U9 "TPS62143RGTR" RGT0016C_V -469.88,144.84 r180 top
U10 "TPS62291DRVR" WSON-6 -200,175 r270 top
U11 "CSD97394Q4M" VSON-CLIP 200,1035 r0 top
U12 "CSD97394Q4M" VSON-CLIP 200,770 r0 top
U13 "INA199A1DCKR" DCK0006A_M 570,590 r180 top
WRLS "LED_0603_GREEN_5mA" LED0603 -490,340 r180 top (schematic designator D14)
Y1 "38.4MHz" ABRA-ABM10 -240,-355 r0 top
Y2 "" ABRA-ABM3B-4_V 240,145 r0 top

## Footprints (in the part's own frame and the unit in brackets; to place one, negate y for a bottom-side part, rotate by r counter-clockwise, add the part's x,y. Pads: shape width x height; smd on the part's side, far side on the other; paste and mask are expansions set on the pad)
ABRA-ABM3B-4_V [mil] "SMT Crystal, 4-Leads, Body 5.2x3.4mm"
  rect 63x55 smd: 1(-81.5,-47.5) 2(-81.5,47.5) 2(81.5,-47.5) 3(81.5,47.5)
  silkscreen extent -30,-72 30,72, body extent -98,-62 98,63, height 43
ABRA-ABM10 [mm] "SMT Crystal, 4-Leads, Body 5.2x3.4mm"
  rect 0.9x0.8 smd: 1(-0.8,-0.65) 2(-0.8,0.65) 2(0.8,-0.65) 3(0.8,0.65)
  silkscreen extent -0.1,-1 0.1,1, body extent -1.24,-1 1.24,1, height 0.51
AH086M555003-T [mm]
  rect 1.1x1.1 smd mask+0: 1(0,-3.95) 2(-1.8,3.95) 2(-1.8,-3.95) 2(0,3.95) 2(1.8,3.95) 2(1.8,-3.95)
  silkscreen extent -3,-4 3,4, body extent -3,-4 3,4, height 1
C0402[1005X55] [mm] "Chip Capacitor, Body 1.0x0.5mm"
  rect 0.5x0.52 smd: 1(-0.41,0) 2(0.41,0)
  silkscreen extent 0,-0.25 0,0.25, body extent -0.5,-0.25 0.5,0.25, height 0.56
C0603[1608X92] [mm] "Chip Capacitor, Body 1.6x0.8mm"
  rect 0.7x0.9 smd: 1(-0.7,0) 2(0.7,0)
  silkscreen extent -0.13,-0.38 0.13,0.38, body extent -0.8,-0.4 0.8,0.4, height 0.93
C1206[3216X160] [mm] "Chip Capacitor, Body 3.2x1.6mm"
  rect 0.95x1.7 smd: 1(-1.4,0) 2(1.4,0)
  silkscreen extent -0.64,-0.76 0.64,0.76, body extent -1.6,-0.75 1.6,0.75, height 1.67
C1210[3225X250] [mm] "Chip Capacitor, Body 3.2x2.5mm"
  rect 0.95x2.6 smd: 1(-1.4,0)
  rect 0.95x2.5 smd: 2(1.4,0)
  silkscreen extent -0.64,-1.27 0.64,1.27, body extent -1.6,-1.25 1.6,1.25, height 2.44
DCK0006A_M [mm] "SOT23, 6-Leads, Body 2.15x1.4mm, Pitch 0.65mm, IPC Low Density"
  rect 1.05x0.45 smd: 1(-1.225,0.65) 2(-1.225,0) 3(-1.225,-0.65) 4(1.225,-0.65) 5(1.225,0) 6(1.225,0.65)
  silkscreen extent -1.35,-1.1 0.3,1.55, body extent -1.14,-1 1.14,1, height 0.94
HHM1595A1 [mm]
  rect 0.3x0.8 smd mask+0: 1(-0.65,-0.9) 2(0,-0.9) 3(0.65,-0.9) 4(0.65,0.9) 5(0,0.9) 6(-0.65,0.9)
  silkscreen extent -1,-0.7 1,0.7, body extent -1,-0.7 1,0.7, height 0.95
IND0805 [mm] "Chip Inductor Body 2.0x1.25mm"
  rect 0.7x1.3 smd: 1(-0.95,0) 2(0.95,0)
  silkscreen extent -0.25,-0.64 0.25,0.64, body extent -1,-0.63 1,0.63, height 0.85
JST-SH-2-SMD-HORZ [mm]
  rect 1.2x1.8 smd: 0(-1.8,0) 0(1.8,0)
  rect 0.6x1.55 smd: 1(-0.5,3.875) 2(0.5,3.875)
  silkscreen extent -2,-0.7 2,3.55, body extent -2,-0.7 2,4.25, height 2.96
LED0603 [mm]
  rect 0.7x0.8 smd: A(-0.8,0) C(0.8,0)
  silkscreen extent -1.35,-0.6 1.35,0.6, body extent -0.8,-0.4 0.8,0.4, height 0.75
"LGA-12 (2x2MM)" [mm] "LGA, 12-Leads, Body 2.00x2.00mmx1.00mm, Pitch 0.50mm"
  rect 0.25x0.25 smd: 1(-0.75,0.75) 2(-0.75,0.25) 3(-0.75,-0.25) 4(-0.75,-0.75) 5(-0.25,-0.75) 6(0.25,-0.75) 7(0.75,-0.75) 8(0.75,-0.25) 9(0.75,0.25) 10(0.75,0.75) 11(0.25,0.75) 12(-0.25,0.75)
  body extent -1,-1 1,1, height 1
MS5611 [mm]
  rect 1.1x0.6 smd: 1(-1.1,1.875) 2(-1.1,0.625) 3(-1.1,-0.625) 4(-1.1,-1.875) 5(1.1,-1.875) 6(1.1,-0.625) 7(1.1,0.625) 8(1.1,1.875)
  silkscreen extent -2,-2.5 1.5,2.9
POWER_JACK_SMD [mil]
  round 80 hole 80: 0(0,0) 0(180,0)
  rect 111x95 smd: 1(0,225) 1(241,225) 2(0,-224.41) 3(241,-224.41)
  silkscreen extent -138,-177 386,178, body extent -198,-248 385,248, height 433
QFN-48 [mm] "48 Pin QFN"
  rect 0.9x0.2 smd mask+0.05: 1(-2.95,2.2) 2(-2.95,1.8) 3(-2.95,1.4) 4(-2.95,1) 5(-2.95,0.6) 6(-2.95,0.2) 7(-2.95,-0.2) 8(-2.95,-0.6) 9(-2.95,-1) 10(-2.95,-1.4) 11(-2.95,-1.8) 12(-2.95,-2.2) 25(2.95,-2.2) 26(2.95,-1.8) 27(2.95,-1.4) 28(2.95,-1) 29(2.95,-0.6) 30(2.95,-0.2) 31(2.95,0.2) 32(2.95,0.6) 33(2.95,1) 34(2.95,1.4) 35(2.95,1.8) 36(2.95,2.2)
  rect 0.2x0.9 smd mask+0.05: 13(-2.2,-2.95) 14(-1.8,-2.95) 15(-1.4,-2.95) 16(-1,-2.95) 17(-0.6,-2.95) 18(-0.2,-2.95) 19(0.2,-2.95) 20(0.6,-2.95) 21(1,-2.95) 22(1.4,-2.95) 23(1.8,-2.95) 24(2.2,-2.95) 37(2.2,2.95) 38(1.8,2.95) 39(1.4,2.95) 40(1,2.95) 41(0.6,2.95) 42(0.2,2.95) 43(-0.2,2.95) 44(-0.6,2.95) 45(-1,2.95) 46(-1.4,2.95) 47(-1.8,2.95) 48(-2.2,2.95)
  rect 4.4x4.4 smd paste-4.4 mask+0.05: 49(0,0)
  rect 1.3x1.3 on Top Paste mask+0.05: Paste1(0,0) Paste2(-1.45,1.45) Paste3(-1.45,-1.45) Paste4(1.45,-1.45) Paste5(1.45,1.45) Paste6(1.45,0) Paste7(-1.45,0) Paste8(0,1.45) Paste9(0,-1.45)
  silkscreen extent -3.5,-3 3,3, body extent -3,-3 3,3, height 1
"QFN-48 (0.5MM)" [mm] "QFN, 48-Leads, Body 7.00x7.00mm, Pitch 0.50mm, Thermal Pad 5.15x5.15mm, IPC Medium Density"
  rect 0.85x0.25 smd: 1(-3.475,2.75) 2(-3.475,2.25) 3(-3.475,1.75) 4(-3.475,1.25) 5(-3.475,0.75) 6(-3.475,0.25) 7(-3.475,-0.25) 8(-3.475,-0.75) 9(-3.475,-1.25) 10(-3.475,-1.75) 11(-3.475,-2.25) 12(-3.475,-2.75) 25(3.475,-2.75) 26(3.475,-2.25) 27(3.475,-1.75) 28(3.475,-1.25) 29(3.475,-0.75) 30(3.475,-0.25) 31(3.475,0.25) 32(3.475,0.75) 33(3.475,1.25) 34(3.475,1.75) 35(3.475,2.25) 36(3.475,2.75)
  rect 0.25x0.85 smd: 13(-2.75,-3.475) 14(-2.25,-3.475) 15(-1.75,-3.475) 16(-1.25,-3.475) 17(-0.75,-3.475) 18(-0.25,-3.475) 19(0.25,-3.475) 20(0.75,-3.475) 21(1.25,-3.475) 22(1.75,-3.475) 23(2.25,-3.475) 24(2.75,-3.475) 37(2.75,3.475) 38(2.25,3.475) 39(1.75,3.475) 40(1.25,3.475) 41(0.75,3.475) 42(0.25,3.475) 43(-0.25,3.475) 44(-0.75,3.475) 45(-1.25,3.475) 46(-1.75,3.475) 47(-2.25,3.475) 48(-2.75,3.475)
  rect 5.15x5.15 smd: 49(0,0)
  silkscreen extent -4.5,-3.73 3.73,3.72, body extent -3.62,-3.62 3.62,3.62, height 1
R0402[1005] [mm] "Chip Resistor, Body 1.0x0.5mm"
  rect 0.45x0.55 smd: 1(-0.45,0) 2(0.45,0)
  silkscreen extent 0,-0.2 0,0.2, body extent -0.5,-0.25 0.5,0.25, height 0.35
R0805[2012] [mm] "Chip Resistor, Body 2.0x1.25mm"
  rect 0.7x1.3 smd: 1(-0.95,0) 2(0.95,0)
  silkscreen extent -0.25,-0.64 0.25,0.64, body extent -1,-0.62 1,0.63, height 0.45
RGT0016C_V [mm] "QFN, 16-Leads, Body 3x3mm, Pitch 0.5mm, Thermal Pad 1.65x1.65mm"
  rect 0.6x0.25 smd: 1(-1.4,0.75) 2(-1.4,0.25) 3(-1.4,-0.25) 4(-1.4,-0.75) 9(1.4,-0.75) 10(1.4,-0.25) 11(1.4,0.25) 12(1.4,0.75)
  rect 0.25x0.6 smd: 5(-0.75,-1.4) 6(-0.25,-1.4) 7(0.25,-1.4) 8(0.75,-1.4) 13(0.75,1.4) 14(0.25,1.4) 15(-0.25,1.4) 16(-0.75,1.4)
  rrect6% 1.55x1.55 on Top Paste: 17(0,0)
  rect 1.7x1.7 smd paste-0.85: 17(0,0)
  silkscreen extent -2.35,-1.57 1.57,1.58, body extent -1.5,-1.5 1.5,1.5, height 1
SOD-123 [mm] "SOD, 2-Leads, Body 2.69x1.6mm"
  rect 1.1x1.22 smd: 1(-1.4,0) 2(1.4,0)
  silkscreen extent -1.76,-0.8 0.6,1.29, body extent -1.75,-0.8 1.75,0.8, height 1.1
SOD-323 [mm] "SODFL, 2-Leads, Body 1.30x2.57mm, IPC Medium Density"
  rect 0.5x0.45 smd: 1(-1.175,0) 2(1.175,0)
  silkscreen extent -1.55,-0.7 0.95,0.7, body extent -1.25,-0.63 1.25,0.62, height 0.98
STM-LQFP64_L [mm] "Thin QFP, 64-Leads, Body 10x10mm, Pitch 0.5mm, IPC High Density"
  oval 1.55x0.25 smd: 1(-5.525,3.75) 2(-5.525,3.25) 3(-5.525,2.75) 4(-5.525,2.25) 5(-5.525,1.75) 6(-5.525,1.25) 7(-5.525,0.75) 8(-5.525,0.25) 9(-5.525,-0.25) 10(-5.525,-0.75) 11(-5.525,-1.25) 12(-5.525,-1.75) 13(-5.525,-2.25) 14(-5.525,-2.75) 15(-5.525,-3.25) 16(-5.525,-3.75) 33(5.525,-3.75) 34(5.525,-3.25) 35(5.525,-2.75) 36(5.525,-2.25) 37(5.525,-1.75) 38(5.525,-1.25) 39(5.525,-0.75) 40(5.525,-0.25) 41(5.525,0.25) 42(5.525,0.75) 43(5.525,1.25) 44(5.525,1.75) 45(5.525,2.25) 46(5.525,2.75) 47(5.525,3.25) 48(5.525,3.75)
  oval 0.25x1.55 smd: 17(-3.75,-5.525) 18(-3.25,-5.525) 19(-2.75,-5.525) 20(-2.25,-5.525) 21(-1.75,-5.525) 22(-1.25,-5.525) 23(-0.75,-5.525) 24(-0.25,-5.525) 25(0.25,-5.525) 26(0.75,-5.525) 27(1.25,-5.525) 28(1.75,-5.525) 29(2.25,-5.525) 30(2.75,-5.525) 31(3.25,-5.525) 32(3.75,-5.525) 49(3.75,5.525) 50(3.25,5.525) 51(2.75,5.525) 52(2.25,5.525) 53(1.75,5.525) 54(1.25,5.525) 55(0.75,5.525) 56(0.25,5.525) 57(-0.25,5.525) 58(-0.75,5.525) 59(-1.25,5.525) 60(-1.75,5.525) 61(-2.25,5.525) 62(-2.75,5.525) 63(-3.25,5.525) 64(-3.75,5.525)
  silkscreen extent -5.65,-4.35 4.35,4.55, body extent -5,-5 5,5, height 1.6
SWITCH [mm]
  rect 1x0.65 smd: 1(-2.05,1.05) 2(2.05,1.05) 3(-2.05,-1.05) 4(2.05,-1.05)
  silkscreen extent -1.3,-1.6 1.3,1.6, body extent -2.3,-1.6 2.3,1.6, height 2.5
TSSP77P38 [mm]
  rect 0.8x1.8 smd mask+0: 1(-1.905,0) 2(-0.635,0) 3(0.625,0) 4(1.905,0)
  silkscreen extent -3.9,-0.6 3.9,2.4
USB-MICROB [mil]
  rect 14x56 smd: D+(0,105) D-(-25.59,105) GND(52,105) ID(26,105) VBUS(-51.18,105)
  rect 71x75 smd: MT1(-157.48,0) MT2(158,0)
  rect 75x75 smd: P$1(-50,0) P$2(50,0)
  silkscreen extent -134,-57 134,113, body extent -157,-98 157,115, height 112
VSON-CLIP [mm] "SON, 18-Leads, Body 4.50x3.50mm, Pitch 0.40mm, Thermal Pad 3.95x1.99mm, IPC Medium Density"
  rect 0.6x0.2 smd: 1(-1.645,1.6) 2(-1.645,1.2) 3(-1.645,0.8) 4(-1.645,-1.6) 4(-1.645,-1.2) 4(-1.645,-0.8) 4(-1.645,-0.4) 4(-1.645,0) 4(-1.645,0.4) 5(1.645,-1.6) 5(1.645,-1.2) 5(1.645,-0.8) 5(1.645,-0.4) 5(1.645,0) 5(1.645,0.4) 6(1.645,0.8) 7(1.645,1.2) 8(1.645,1.6)
  rect 2.2x4.05 smd: 9(0,0)
  Component Side region: 1.8,0.5 1.325,0.5 1.325,-1.7 1.8,-1.7
  Component Side region: -1.8,0.5 -1.325,0.5 -1.325,-1.7 -1.8,-1.7
  silkscreen extent -2.4,-2.45 1.95,2.5, body extent -1.8,-2.3 1.8,2.3, height 1
WS2812B [mil]
  rect 65x40 smd: 1(-101.46,63) 2(-101.46,-62.99) 3(102,-62.99) 4(102,63)
  silkscreen extent -100,-102 100,104, body extent -105,-97 105,97, height 59
WSON-6 [mm] "SON, 6-Leads, Body 2x2mm, Pitch 0.65mm, Thermal Pad 1.6x1mm, TI Recommended"
  rect 0.45x0.3 smd: 1(-0.975,0.65) 2(-0.975,0) 3(-0.975,-0.65) 4(0.975,-0.65) 5(0.975,0) 6(0.975,0.65)
  rrect14% 1x0.7 on Top Paste: 7(0,0.45) 7(0,-0.45)
  rect 1x1.6 smd paste-0.5: 7(0,0)
  silkscreen extent -1.45,-1.2 1.05,1.2, body extent -1.05,-1.05 1.05,1.05, height 0.81

## Part data
BOOT RESET: library part DIPT-DTSM-6, "Switch, SPNO Push Button SMD"
C1 C14 C15 C16 C19 C22 C23 C24 C25 C26 C27 C31 C34 C37 C41 C42 C43 C44_1 C44_2 C44_3 C44_4 C45 C46 C58 C69: library part CAP_0.1uF_6.3V_0402_10%, "0.1uF 6.3V 10% 0402 (1005 Metric)"
C17 C18 C35 C38: library part CAP_10pF_50V_0402_1%, "10pF 50V 1% 0402 (1005 Metric)"
C20: library part CAP_27pF_50V_0402_1%, "27pF 50V 1% 0402 (1005 Metric)"
C21: library part CAP_1.2pF_50V_0402_0.05pF, "1.2pF 50V 0.05pF 0402 (1005 Metric)"
C28: library part CAP_820pF_50V_0402_5%, "820pF 50V 5% 0402 (1005 Metric)"
C29: library part CAP_18pF_50V_0402_1%, "18pF 50V 1% 0402 (1005 Metric)"
C30 C32: library part CAP_12pF_50V_0402_5%, "12pF 50V 5% 0402 (1005 Metric)"
C33: library part CAP_47uF_6.3V_1206_10%, "47uF 6.3V 10% 1206 (3216 Metric)"
C36 C39: library part CAP_330pF_50V_0402_5%, "330pF 50V 5% 0402 (1005 Metric)"
C40 C73: library part CAP_10nF_50V_0402_10%, "10nF 50V 10% 0402 (1005 Metric)"
C47 C68 C70 C71 C81 C82 C83 C86: library part CAP_1uF_6.3V_0402_10%, "1uF 6.3V 10% 0402 (1005 Metric)"
C48 C79 C84 C85: library part CAP_4.7uF_6.3V_0402_20%, "4.7uF 6.3V 20% 0402 (1005 Metric)"
C49 C50: library part CAP_15pF_50V_0402_5%, "15pF 50V 5% 0402 (1005 Metric)"
C51 C52 C53 C54 C55 C56 C57: library part CAP_2.2uF_6.3V_0402_20%, "2.2uF 6.3V 20% 0402 (1005 Metric)"
C59: library part CAP_10uF_50V_1206_20%, "10uF 50V 20% 1206 (3216 Metric)"
C60 C66 C67 C72 C76 C77 C78: library part CAP_0.1uF_100V_0402_10%, "0.1uF 100V 10% 0402 (1005 Metric)"
C61 C65: library part CAP_47uF_6.3V_1210_10%, "47uF 6.3V 10% 1210 (3225 Metric)"
C62: library part CAP_3.3nF_50V_0402_10%, "3.3nF 50V 10% 0402 (1005 Metric)"
C63 C64: library part CAP_10uF_6.3V_0402_20%, "10uF 6.3V 20% 0402 (1005 Metric)"
C74 C75: library part CAP_10uF_16V_0603_10%, "10uF 16V 10% 0603 (1608 Metric)"
C80 C88: library part CAP_4.7nF_50V_0402_10%, "4.7nF 50V 10% 0402 (1005 Metric)"
C87: library part CAP_33pF_50V_0402_1%, "33pF 50V 1% 0402 (1005 Metric)"
COIL: library part JST_SH_2_HORZ
JP1: library part USB_MICROB_SMT
JP2: library part POWER_JACK
L4 L5: library part IND_2.2uH_1.7A_0805_20%, "2.2uH 20% 1.7A 0805"
R2: library part RES_16K_0402_1%, "16K 0.063W 1% 0402 (1005 Metric)"
R3: library part RES_11K_0402_1%, "11K 0.063W 1% 0402 (1005 Metric)"
R4: library part RES_270R_0402_1%, "270R 0.063W 1% 0402 (1005 Metric)"
R5 R6 R7: library part RES_2K2_0402_1%, "2K2 0.063W 1% 0402 (1005 Metric)"
R8 R9 R22: library part RES_22R_0402_1%, "22R 0.063W 1% 0402 (1005 Metric)"
R10 R26 R27 R29 R30 R31 R32 R34 R35: library part RES_10K_0402_1%, "10K 0.063W 1% 0402 (1005 Metric)"
R11 R23: library part RES_100K_0402_1%, "100K 0.063W 1% 0402 (1005 Metric)"
R12: library part RES_150R_0402_1%, "150R 0.063W 1% 0402 (1005 Metric)"
R13 R18 R25 R28 R36 R38: library part RES_10R_0402_1%, "10R 0.063W 1% 0402 (1005 Metric)"
R14: library part RES_1K_0402_1%, "1K 0.063W 1% 0402 (1005 Metric)"
R15 R16: library part RES_1R_0402_1%, "1R 0.063W 1% 0402 (1005 Metric)"
R17: library part RES_0.02R_0805_1%, "0.02R 0.5W 1% 0805 (2012 Metric)"
R19 R37: library part RES_475R_0402_1%, "475R 0.063W 1% 0402 (1005 Metric)"
R20 R21: library part RES_523K_0402_1%, "523K 0.063W 1% 0402 (1005 Metric)"
R24: library part RES_12.1K_0402_1%, "12.1K 0.063W 1% 0402 (1005 Metric)"
R33: library part RES_76K8_0402_1%, "76K8 0.063W 1% 0402 (1005 Metric)"
R39 R40: library part RES_3K6_0402_1%, "3K6 0.063W 1% 0402 (1005 Metric)"
R41: library part RES_48K7_0402_1%, "48K7 0.063W 1% 0402 (1005 Metric)"
R42 R44: library part RES_56K2_0402_1%, "56K2 0.063W 1% 0402 (1005 Metric)"
R43: library part RES_53K6_0402_1%, "53K6 0.063W 1% 0402 (1005 Metric)"
U1: "IC, Qi Compliant Wireless Power Transmitter Manager"
U4: "UWB DW1000"
U6: "Board Mount Hall Effect / Magnetic Sensors Ultra Lo-Pwr Hi Perf 3-Axis 1.9-3.6V"
U7: library part CMP-0243-00089-2, "ARM Cortex-M4 32-bit MCU+FPU, 210 DMIPS, 1024 kB Flash, 192 kB Internal RAM, 51 I/Os, 64-pin LQFP, -40 to 105 degC, Tape and Reel"
U9: library part CMP-0323-00146-3, "Buck Step Down Regulator with 3 to 17 V Input and 5 V Output, -40 to 85 degC, 16-Pin QFN (RGT), Green (RoHS & no Sb/Br)"
U10: "Voltage Regulators - Switching Regulators 2.25MHz 1A Step-Down Cnvrtr 3.3V Output"
U13: library part CMP-0704-00049-2, "Voltage Output, High or Low Side Measurement, Bi-Directional Zero-Drift Series, 2.7 to 26 V, -40 to 125 degC, 6-pin SOT23 (DCK6), Green (RoHS & no Sb/Br)"
Y1: library part ABM10-165-38.400MHZ-T3
Y2: library part ABRA-ABM3B-4

## Free pads (board coordinates)
  round 122.05 hole 122.05 mask+0: 0(-960,490) 1(960,490) 2(960,-490) 3(-960,-490)

## Via types
v1: diameter 20, hole 10, Component Side to Solder Side, 408 vias

## Nets (pads, with @x,y where several pads share a name; then routed paths per layer and width w, separated by ;. In a path a pad name is that pad's centre, name@x,y a point inside that pad or via, vN(x,y) a via of type N, cw(c..) or ccw(c..) an arc to the next point about the centre after c; other vN are vias at no path point)
5V: C61.2 C65.1 C70.2 C71.2 D1.1 D2.1 D3.1 D4.1 D9.1 D10.2 L4.2 R5.2 R11.2 R13.1 R17.2 R33.1 U9.14 U11.1 U11.2 U12.1 U12.2 | length 623
  Component Side w10: v1(-510,-100) -510,45.56 -479.72,75.83 U9.14@-479.72,89.72 ; v1(133.86,895) 135.24,893.62 U12.1@135.24,832.99 U12.2@135.24,817.24 ; v1(133.86,1160) 135.24,1158.62 U11.1@135.24,1097.99 U11.2@135.24,1082.24 ; R17.2@340,562.6 357.4,580 R13.1@397.28,580
  Solder Side w10: v1(-82.28,770) -10,770 v1(80,680)
  other v1: 678.71,-822.19 -822.19,-678.71 732.28,-610 -380,-160 -350,-160 -320,-160 -290,-160 -260,-160 -230,-160 -380,-130 -350,-130 -320,-130 -290,-130 -260,-130 -230,-130 -380,-100 -350,-100 -320,-100 -290,-100 -260,-100 -230,-100 -342.28,180 235,520 265,520 295,520 325,520 355,520 235,550 265,550 295,550 325,550 355,550 235,580 265,580 295,580 325,580 822.19,678.71 -678.71,822.19
COMM+: R25.1 U1.37 U1.39 | length 209.4
  Component Side w10: U1.37@-168.19,571.73 -141.73,571.73 v1(-140,570) ; U1.39@-168.19,611.1 -128.6,611.1 -114.7,625 v1(-87.72,625)
  Solder Side w10: v1(-140,570) -110,570 -87.72,592.28 v1(-87.72,625)
COMM-: R28.1 U1.38 U1.40 | length 168.4
  Component Side w10: U1.38@-168.19,591.42 -118.58,591.42 v1(-110,600) -102.72,600 R28.1@-87.72,585 ; U1.40@-168.19,630.79 -143.59,630.79 v1(-142.28,632.1)
  Solder Side w10: v1(-142.28,632.1) -134.82,632.1 -107.72,605 -110,602.72 v1(-110,600)